# Altium PCB OK1050-C_V1.2.PcbDoc (part 3 of 3)
Units mm, origin at the board's own origin, x right, y up, seen from the top; angles counter-clockwise.
Board outline 103.88 x 80.73 mm, 2 copper layers (Component Side, Bottom Layer), stack 0.325 mm thick; 231 components, 276 nets, 1026 pads, 717 vias.
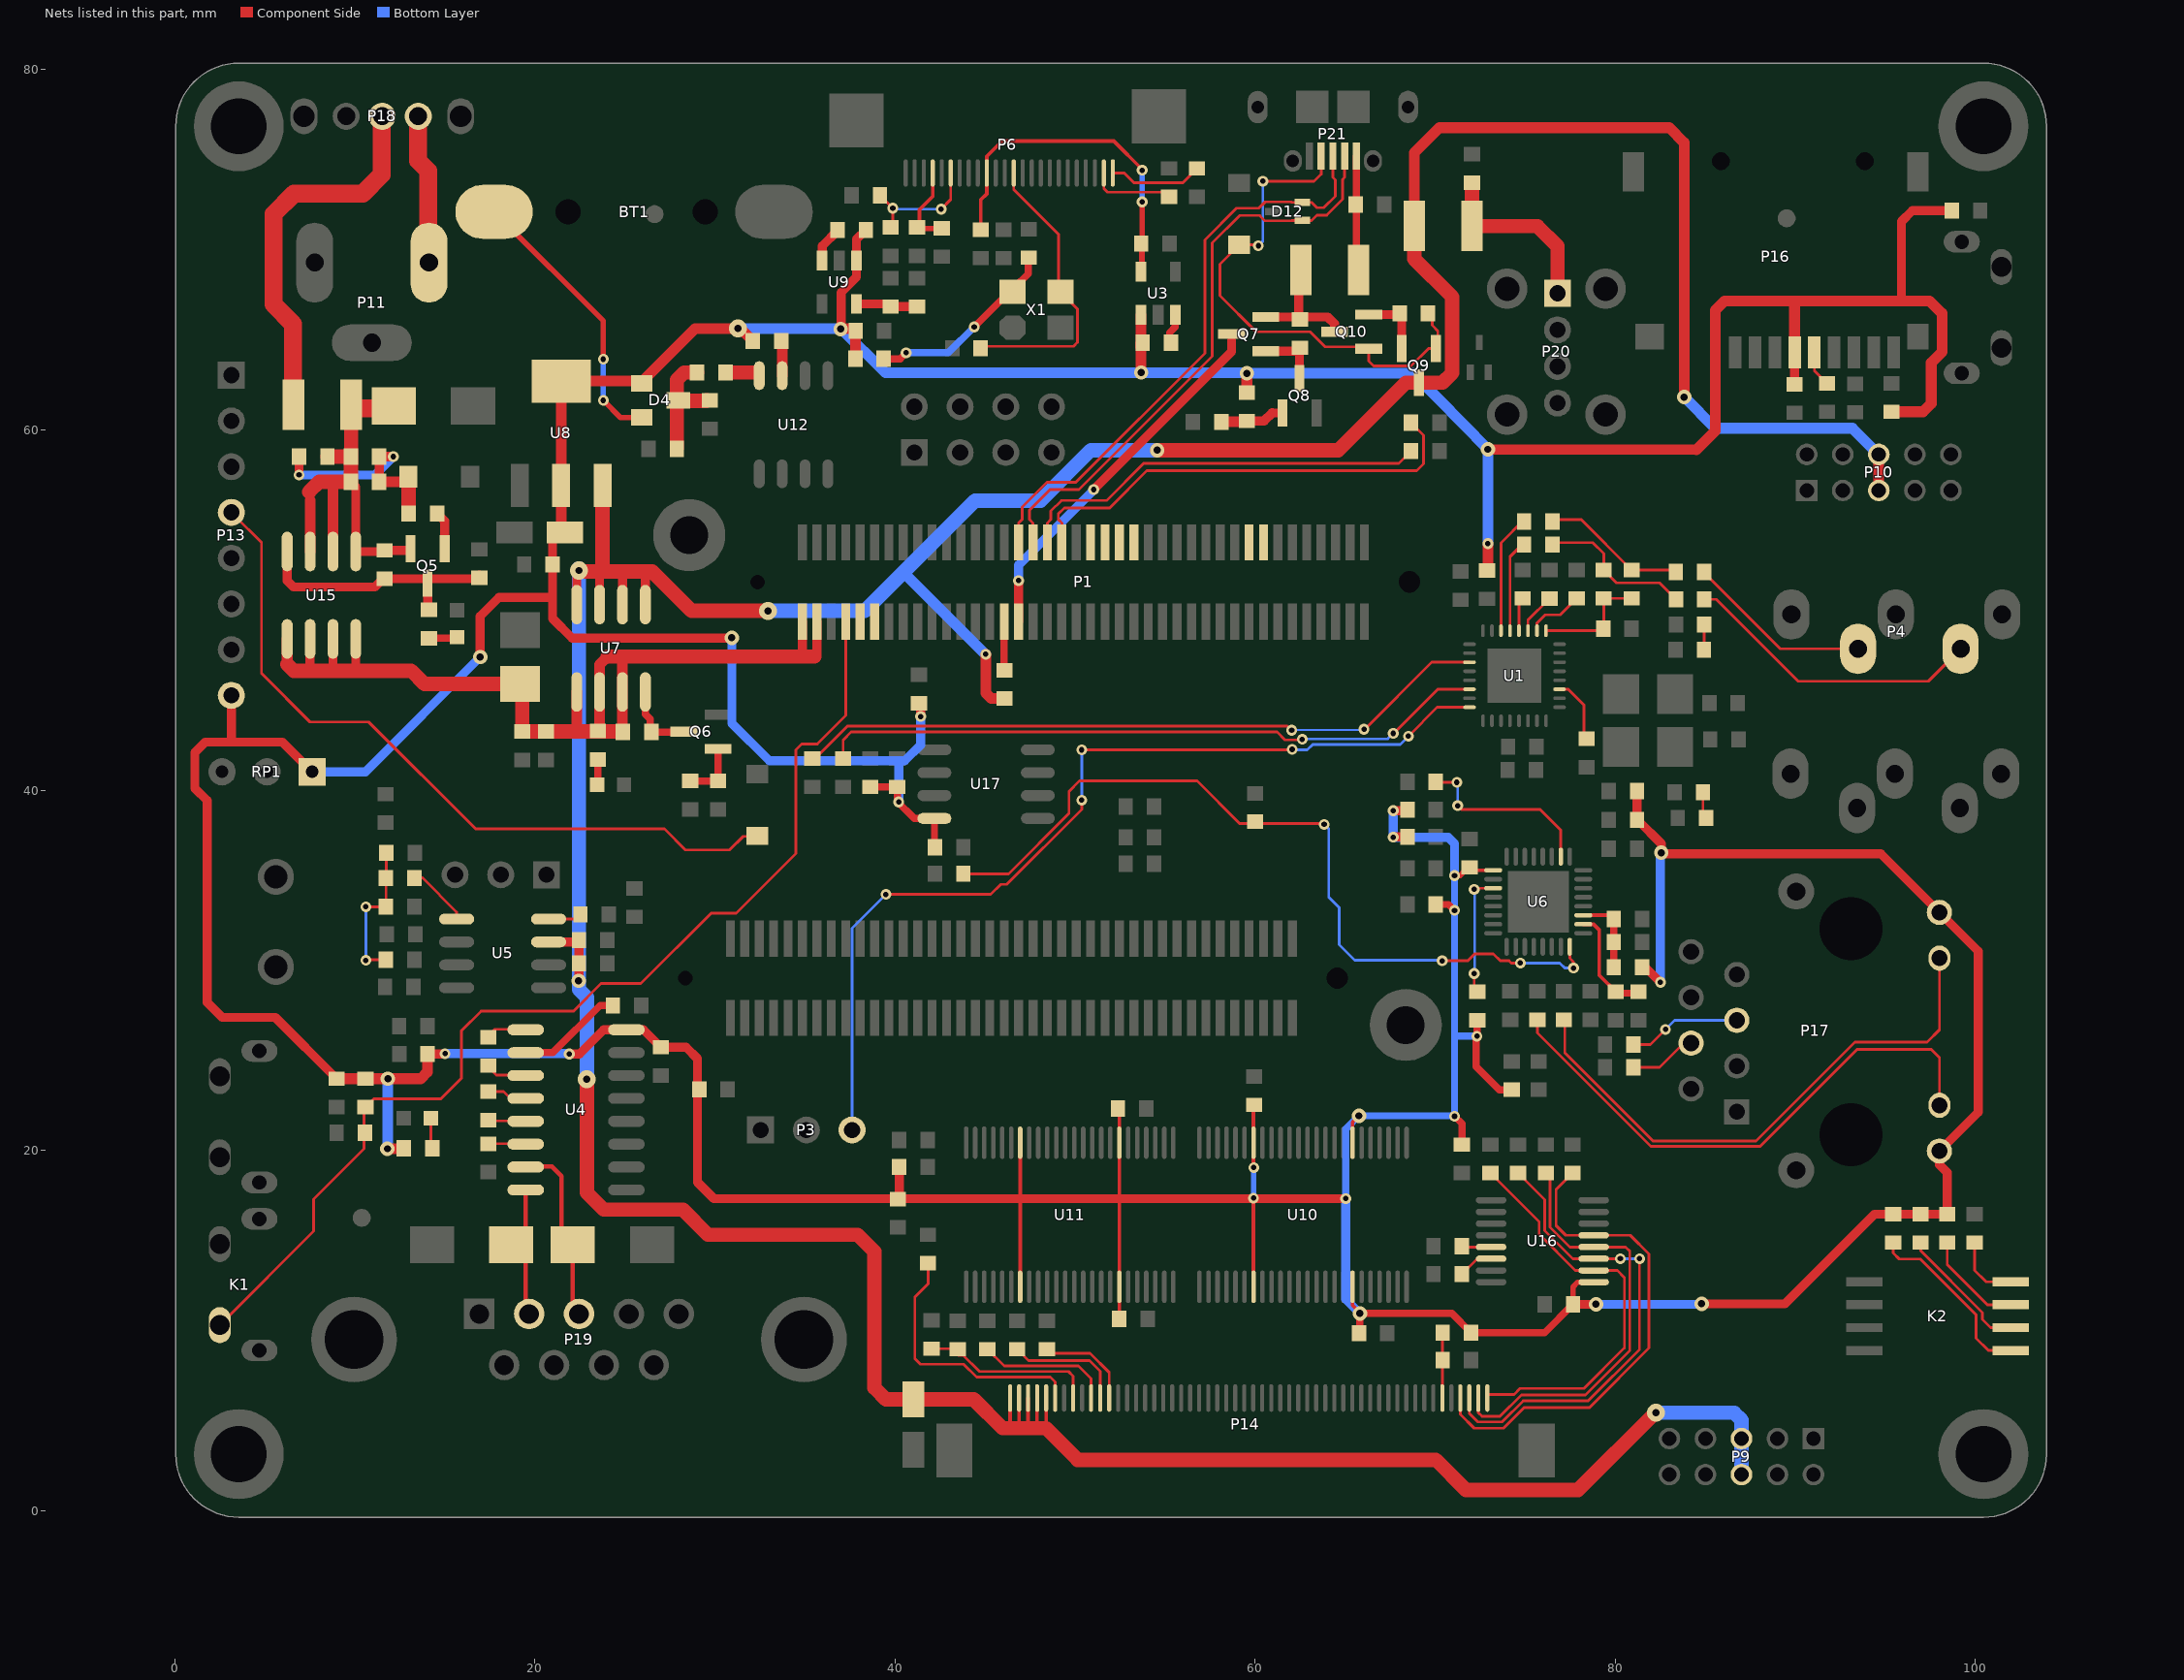
[diagram p3: the nets of this part, all layers, seen from the top]

## Via types
v1: diameter 0.6, hole 0.3, Component Side to Bottom Layer, tented both sides, 667 vias
v2: diameter 0.8, hole 0.4, Component Side to Bottom Layer, tented both sides, 20 vias
v3: diameter 0.66, hole 0.3, Component Side to Bottom Layer, tented both sides, 16 vias
v4: diameter 0.5, hole 0.3, Component Side to Bottom Layer, tented both sides, 9 vias
v5: diameter 1, hole 0.4, Component Side to Bottom Layer, tented both sides, 5 vias

## Nets (pads, with @x,y where several pads share a name; then routed paths per layer and width w, separated by ;. In a path a pad name is that pad's centre, name@x,y a point inside that pad or via, vN(x,y) a via of type N, cw(c..) or ccw(c..) an arc to the next point about the centre after c; other vN are vias at no path point) (continued)
MCLK: P6.13 R62.1 X1.3 | length 16.5
  Component Side w0.152: R62.1@44.602,64.491 44.755,64.643 49.911,64.643 50.133,64.865 50.133,66.721 X1.3@49.179,67.675 ; P6.13@46.593,74.269 46.593,73.345 49.077,70.862 X1.3@49.077,67.65
MICBIAS: C5.2 R3.2 R5.2 U1.1 | length 6.8
  Component Side w0.152: U1.1@76.147,48.626 U1.1@76.147,48.855 C5.2@79.477,48.855 ; C5.2@79.35,48.997 R3.2@79.35,50.648 R5.2@80.899,50.648
MICL: C8.2 FB5.2 R3.1 | length 8.7
  Component Side w0.152: C8.2@76.505,53.746 78.74,53.746 79.35,53.137 R3.1@79.35,52.222 80.061,51.511 82.448,51.511 FB5.2@83.363,50.597
MICR: C10.2 FB4.2 R5.1 | length 7.9
  Component Side w0.152: C10.2@76.505,55.016 78.105,55.016 R5.1@80.899,52.222 FB4.2@83.25,52.222
N3_FLEXSPI__B_SS0: P1.17
N4_FLEXSPI_D1_A: P1.35
N6_OTG1_VBUS: P1.50 Q7.3 | length 20.5
  Component Side w0.5: P1.50@46.861,49.361 46.863,49.363 v1(46.863,51.638) ; v1(51.029,56.693) 58.689,64.353 58.689,64.973
  Bottom Layer w0.5: v1(46.863,51.638) 46.863,52.498 46.861,52.5 51.029,56.667 v1(51.029,56.693)
N13_CLK1_OUT_P: P1.72
NetBT1_1: BT1.1 D4.2 | length 15.3
  Component Side w0.3: BT1.1@18.038,72.111 18.038,71.81 23.8,66.049 v1(23.8,63.932) ; v1(23.8,61.646) 24.765,60.681 D4.2@25.857,60.681
  Bottom Layer w0.3: v1(23.8,61.646) v1(23.8,63.932)
NetC4_2: C4.2 U1.27 | length 3.7
  Component Side w0.152: U1.27@76.897,45.605 77.382,45.605 78.257,44.729 78.257,43.002 C4.2@78.41,42.85
NetC8_1: C8.1 U1.5 | length 5.4
  Component Side w0.152: U1.5@74.147,48.626 U1.5@74.147,48.855 74.147,52.963 C8.1@74.93,53.746
NetC10_1: C10.1 U1.6 | length 6.9
  Component Side w0.152: U1.6@73.647,48.641 U1.6@73.647,48.855 73.647,53.733 C10.1@74.93,55.016
NetC11_2: C11.2 R71.2 U9.5 | length 3.6
  Component Side w0.5: U9.5@37.856,66.999 39.605,66.999 C11.2@39.751,66.853 R71.2@41.224,66.853 R71.2@41.078,66.999
NetC16_1: C16.1 R12.2 | length 1.3
  Component Side w0.152: C16.1@84.861,38.532 R12.2@84.861,39.878
NetC17_1: C17.1 R14.2 | length 1.4
  Component Side w0.152: R14.2@84.938,47.828 C17.1@84.938,49.2
NetC18_1: C18.1 FB6.1 P6.4 | length 4.9
  Component Side w0.2: FB6.1@41.046,71.196 41.351,71.501 41.351,72.238 42.093,72.98 P6.4@42.093,74.269
  Component Side w0.3: FB6.1@41.351,71.196 C18.1@42.723,71.196
NetC19_1: C19.1 P6.6 R18.1 | length 7.2
  Component Side w0.152: C19.1@39.167,73.025 v1(39.878,72.314) R18.1@39.878,71.196 ; v1(42.56,72.263) 43.093,72.796 P6.6@43.093,74.269
  Bottom Layer w0.152: v1@39.878,72.263 v1(42.56,72.263) 42.56,72.07 v1@42.57,72.06
NetC23_1: C23.1 U4.1 | length 2.3
  Component Side w0.152: C23.1@17.342,26.284 17.779,26.722 U4.1@19.495,26.722
NetC23_2: C23.2 U4.3 | length 2.4
  Component Side w0.152: C23.2@17.342,24.709 17.869,24.182 U4.3@19.495,24.182
NetC25_2: C25.2 U4.2 | length 5.9
  Component Side w0.4: U4.2@19.495,25.426 21.007,25.426 23.622,28.042 C25.2@24.333,28.042
NetC26_2: C26.2 U4.6 | length 2.1
  Component Side w0.152: C26.2@17.373,20.372 U4.6@19.495,20.372
NetC27_1: C27.1 U4.5 | length 2.1
  Component Side w0.152: C27.1@17.412,21.642 U4.5@19.495,21.642
NetC27_2: C27.2 U4.4 | length 2.2
  Component Side w0.152: C27.2@17.418,23.261 18.268,23.261 18.643,22.886 U4.4@19.495,22.886
NetC34_1: C34.1 R49.2 R50.2 R51.2 | length 8.3
  Component Side w0.152: v1(10.617,30.556) 10.643,30.582 R51.2@11.76,30.582 ; v1@10.617,33.477 10.668,33.528 R50.2@11.735,33.528 R49.2@11.735,35.128 11.76,35.154 C34.1@11.76,36.525
  Bottom Layer w0.152: v1(10.617,30.556) v1(10.617,33.528)
NetC41_1: C41.1 C42.1 FB8.1 U6.3 | length 4.6
  Component Side w0.2: U6.3@78.217,33.057 C42.1@80.162,33.057
  Component Side w0.381: FB8.1@79.908,30.175 C42.1@79.908,32.817
NetC43_1: C43.1 C44.1 U6.2 | length 6.1
  Component Side w0.2: U6.2@78.217,32.557 78.796,32.557 79.096,32.258 79.096,29.743 C44.1@80.112,28.727
  Component Side w0.381: C44.1@80.112,28.727 C43.1@81.255,28.727
NetC45_2: C45.2 R2.1 U6.32 | length 46
  Component Side w0.152: R2.1@43.79,35.357 46.304,35.357 49.657,38.71 49.657,39.929 50.241,40.513 56.769,40.513 59.131,38.151 v1@63.83,38.151 ; v1(70.383,30.531) 71.806,30.531 72.187,30.912 73.228,30.912 73.609,30.531 74.092,30.531 74.219,30.404 v1(74.727,30.404) ; U6.32@77.467,31.307 77.467,30.66 77.673,30.455 v1(77.673,30.124)
  Bottom Layer w0.152: v1(63.83,38.1) 64.084,37.846 64.084,34.061 64.668,33.477 64.668,31.42 65.532,30.556 v1@70.409,30.556 ; v1(74.727,30.404) 76.911,30.404 77.191,30.124 v1(77.673,30.124)
NetC47_2: C47.2 P17.4 | length 4
  Component Side w0.152: C47.2@80.95,24.613 82.455,24.613 P17.4@84.203,26.361
NetC48_2: C48.2 P17.5 | length 6.3
  Component Side w0.152: C48.2@80.95,25.883 81.94,25.883 v1(82.779,26.721)
  Bottom Layer w0.152: v1(82.779,26.721) 83.282,27.224 P17.5@86.743,27.224
NetC54_1: C54.1 D9.2 F1.2 Q5.2 R81.2 R82.2 R83.2 U15.1 U15.2 U15.3 | length 23.8
  Component Side w0.5: R82.2@9.779,57.125 10.058,56.845 U15.1@10.058,53.25 C54.1@11.633,53.25 ; C54.1@11.735,53.315 Q5.2@13.01,53.315
  Component Side w0.6: U15.3@7.518,53.25 7.518,56.109 ; U15.2@8.788,53.25 8.788,57.048
  Component Side w0.8: 7.468,56.566 8.026,57.125 R82.2@9.779,57.125 R83.2@9.779,58.522 R81.2@8.484,58.522 ; R83.2@9.798,58.694 F1.2@9.798,61.209
  Component Side w1: F1.2@9.798,61.209 12.322,61.209 D9.2@12.348,61.184
NetC54_2: C54.2 Q5.3 R89.2 R91.1 U15.4 | length 14.2
  Component Side w0.5: U15.4@6.248,53.25 6.248,51.638 6.604,51.283 11.125,51.283 C54.2@11.608,51.765 ; C54.2@11.659,51.74 16.713,51.74 R89.2@16.916,51.943 ; R91.1@14.021,50.013 14.046,50.038 Q5.3@14.046,51.501
NetC60_2: C60.2 F2.2 P20.1 | length 10.2
  Component Side w0.8: C60.2@72.034,73.736 F2.2@72.034,71.323 75.667,71.323 76.784,70.206 P20.1@76.784,67.589
NetC61_2: C61.2 F3.1 P21.1 | length 6.2
  Component Side w0.4: F3.1@65.613,68.986 P21.1@65.613,75.201
NetC62_1: C62.1 P14.47 R54.2 | length 9.5
  Component Side w0.152: C62.1@42.031,8.987 R54.2@43.428,8.987 ; R54.2@43.504,8.631 43.783,8.631 44.693,7.722 49.632,7.722 49.89,7.463 P14.47@49.89,6.25
NetC68_2: C68.2 R68.1 X1.4 | length 10.5
  Component Side w0.4: R68.1@39.37,63.957 40.284,63.957 v1(40.615,64.287) v1@40.64,64.313 ; v1(44.399,65.724) X1.4@46.351,67.675 ; X1.4@46.376,67.954 46.681,67.954 47.396,68.67 C68.2@47.396,69.291
  Bottom Layer w0.4: v1(40.615,64.287) 42.963,64.287 v1(44.399,65.724)
NetD3_2: D3.2 P13.4 | length 41.6
  Component Side w0.152: P13.4@3.073,55.27 3.302,55.27 4.826,53.746 4.826,46.48 7.517,43.79 10.77,43.79 16.714,37.845 27.204,37.845 28.366,36.683 30.816,36.683 31.572,37.44 D3.2@32.36,37.44
NetD5_2: D5.2 P21.4 Q9.1 Q10.1 R97.1 | length 29
  Component Side w0.152: v1(60.173,70.231) 60.122,70.282 D5.2@59.106,70.282 58.039,69.215 58.039,67.462 60.046,65.456 63.043,65.456 63.881,64.618 Q10.1@66.304,64.618 ; v1(60.427,73.812) 63.271,73.812 63.663,74.204 P21.4@63.663,75.201 ; Q10.1@66.304,64.506 66.304,63.82 66.576,63.548 68.654,63.548 69.632,64.526 Q9.1@70.038,64.526 70.14,64.526 70.14,65.496 69.825,65.811 R97.1@69.825,66.472
  Bottom Layer w0.152: v1(60.173,70.231) 60.427,70.485 v1(60.427,73.812)
NetD10_2: D10.2 R81.1 R82.1 R83.1 R85.2 | length 12.3
  Component Side w0.2: D10.2@12.902,57.125 D10.2@12.998,57.221
  Component Side w0.5: v1(6.909,57.506) R81.1@6.909,58.522
  Component Side w0.52: R82.1@11.354,57.125 R83.1@11.354,58.522 v1(12.141,58.522)
  Component Side w0.6: R82.1@11.354,57.125 D10.2@12.902,57.125
  Component Side w0.8: R85.2@12.998,55.443 D10.2@12.998,57.221
  Bottom Layer w0.5: v1(6.909,57.506) 11.125,57.506 v1(12.141,58.522)
NetF1_1: F1.1 P18.2 | length 21
  Component Side w1: F1.1@6.579,61.595 6.579,65.888 5.486,66.98 5.486,71.984 6.629,73.127 10.439,73.127 11.494,74.181 P18.2@11.494,77.419
NetF3_2: F3.2 Q7.2 Q10.3 R92.2 | length 6.9
  Component Side w0.5: Q7.2@60.589,66.279 R92.2@62.418,66.279 ; F3.2@62.418,68.768 R92.2@62.418,66.279 ; Q10.3@64.404,65.456 64.404,65.898 64.023,66.279 R92.2@62.418,66.279
NetFB4_1: FB4.1 P4.2 | length 10.7
  Component Side w0.152: FB4.1@84.892,52.116 89.159,47.849 P4.2@93.473,47.849 P4.2@93.473,48.23
NetFB5_1: FB5.1 P4.5 | length 17.2
  Component Side w0.152: FB5.1@84.938,50.597 85.598,50.597 90.145,46.05 97.375,46.05 P4.5@99.173,47.849 P4.5@99.173,48.23
NetK2_5: K2.5 R31.2 | length 10.1
  Component Side w0.152: R31.2@95.428,14.884 95.428,14.3 95.758,13.97 96.926,13.97 100.025,10.871 100.025,9.576 100.711,8.89 K2.5@101.956,8.89
NetK2_6: K2.6 R30.2 | length 7.5
  Component Side w0.152: R30.2@96.952,14.884 96.952,14.427 100.381,10.998 100.381,10.617 100.838,10.16 K2.6@101.956,10.16
NetK2_7: K2.7 R28.2 | length 5.7
  Component Side w0.152: R28.2@98.425,14.884 98.425,13.665 100.66,11.43 K2.7@101.956,11.43
NetK2_8: K2.8 R27.2 | length 3.8
  Component Side w0.152: R27.2@99.949,14.884 99.949,13.335 100.584,12.7 K2.8@101.956,12.7
NetLED2_1: LED2.1 R26.2 | length 1.8
  Component Side w0.152: LED2.1@14.224,21.793 14.224,20.193 R26.2@14.3,20.117 R26.2@14.3,20.217
NetLED3_1: LED3.1 R87.2 | length 1.4
  Component Side w0.4: LED3.1@23.495,40.31 R87.2@23.495,41.707
NetLED4_1: LED4.1 R91.2 | length 1.5
  Component Side w0.4: R91.2@14.122,48.438 LED4.1@15.608,48.438
NetP6_23: P6.23 R20.1 | length 4.7
  Component Side w0.152: P6.23@51.593,74.269 51.593,73.4 51.791,73.203 54.966,73.203 R20.1@55.22,72.949
NetP6_24: P6.24 R47.1 | length 5.2
  Component Side w0.152: P6.24@52.093,74.269 52.731,74.269 53.264,73.736 55.982,73.736 R47.1@56.769,74.524
NetP11_1: P11.1 P18.1 | length 8.6
  Component Side w1: P18.1@13.526,77.419 13.526,74.943 14.072,74.397 14.072,69.825 P11.1@14.605,69.291
NetP14_6: P14.6 R45.2 R46.2 | length 3.6
  Component Side w0.152: P14.6@70.39,6.445 R45.2@70.39,10.084
NetP14_43: P14.43 R103.2 | length 5.4
  Component Side w0.152: R103.2@48.431,8.961 48.655,8.738 50.825,8.738 51.89,7.673 P14.43@51.89,6.25
NetP14_44: P14.44 R104.2 | length 6.6
  Component Side w0.152: R104.2@46.78,8.961 47.411,8.33 50.801,8.33 51.39,7.741 P14.44@51.39,6.25
NetP14_45: P14.45 R105.2 | length 7.5
  Component Side w0.152: R105.2@45.129,8.961 46.064,8.026 50.19,8.026 50.89,7.327 P14.45@50.89,6.25
NetP14_49: P14.49 R53.2 | length 14.8
  Component Side w0.152: R53.2@41.834,13.741 41.834,12.598 41.097,11.862 41.097,8.433 41.402,8.128 43.815,8.128 44.531,7.412 48.621,7.412 48.89,7.142 P14.49@48.89,6.25
NetP16_5: P16.5 R57.2 | length 2
  Component Side w0.152: P16.5@91.05,64.309 91.05,63.281 R57.2@91.745,62.586
NetP17_10: P17.10 R77.2 | length 30.3
  Component Side w0.152: R77.2@75.667,27.254 75.667,26.518 81.966,20.218 88.036,20.218 93.421,25.603 97.536,25.603 97.993,25.146 P17.10@97.993,22.911
NetP17_11: P17.11 R78.2 | length 31.1
  Component Side w0.152: R78.2@77.191,27.178 77.191,25.424 82.091,20.523 87.808,20.523 93.294,26.01 97.307,26.01 97.993,26.695 P17.11@97.993,30.674
NetQ5_1: Q5.1 R85.1 | length 2.1
  Component Side w0.5: R85.1@14.573,55.367 14.996,54.944 Q5.1@14.996,53.401
NetQ6_1: Q6.1 R88.1 R90.2 | length 3.3
  Component Side w0.4: R90.2@28.626,40.513 R88.1@30.175,40.513 Q6.1@30.175,42.296
NetQ6_3: Q6.3 R84.1 U7.4 | length 4.1
  Component Side w0.4: U7.4@26.137,45.429 26.137,44.221 26.416,43.942 R84.1@26.416,43.231 ; R84.1@26.441,43.231 Q6.3@28.26,43.231
NetQ7_1: Q7.1 Q8.3 R92.1 | length 3.8
  Component Side w0.5: Q7.1@60.589,64.379 62.169,64.379 62.459,64.668 Q8.3@62.459,62.85
NetQ8_1: Q8.1 R95.1 R96.2 | length 3.5
  Component Side w0.5: R95.1@59.538,60.503 60.503,60.503 ; 60.95,60.95 Q8.1@61.509,60.95
  Component Side w0.52: 60.503,60.503 60.95,60.95
  Component Side w0.6: R96.2@58.115,60.452 R95.1@59.411,60.452
NetQ9_2: Q9.2 Q10.2 R97.2 | length 3.5
  Component Side w0.5: Q10.2@66.304,66.406 R97.2@68.021,66.396 ; Q9.2@68.138,64.526 R97.2@68.138,66.355
NetR1_1: R1.1 U9.3 | length 2.1
  Component Side w0.5: U9.3@35.956,69.399 35.956,70.211 R1.1@36.805,71.059
  Component Side w0.6: R1.1@36.805,71.059 R1.1@36.805,71.11
NetR4_1: R4.1 U1.2 | length 3.4
  Component Side w0.152: U1.2@75.647,48.626 U1.2@75.647,48.855 75.647,49.281 76.098,49.733 76.937,49.733 R4.1@77.851,50.648
NetR7_1: R7.1 U1.3 | length 2.5
  Component Side w0.152: U1.3@75.147,48.626 U1.3@75.147,48.855 75.147,49.449 R7.1@76.34,50.643
NetR8_1: R8.1 U1.4 | length 2.1
  Component Side w0.152: U1.4@74.647,48.626 U1.4@74.647,48.855 74.647,50.44 R8.1@74.854,50.648
NetR19_1: R19.1 U3.3 | length 1.7
  Component Side w0.4: R19.1@55.245,64.846 55.245,65.405 55.56,65.72 U3.3@55.56,66.389
NetR35_1: R35.1 U1.14 | length 37.3
  Component Side w0.152: R35.1@37.114,41.758 37.114,42.778 37.567,43.231 61.214,43.231 61.651,42.794 v1@62.636,42.794 ; v1@67.666,43.129 70.141,45.605 U1.14@71.897,45.605
  Bottom Layer w0.152: v1@62.636,42.85 67.361,42.85 v1(67.666,43.155)
  other v1: 62.611,42.824
NetR36_1: R36.1 U1.11 | length 38.8
  Component Side w0.152: R36.1@35.611,41.758 35.585,41.783 37.363,43.561 61.773,43.561 v1@61.976,43.358 ; v1@66.04,43.332 69.813,47.105 U1.11@71.897,47.105
  Bottom Layer w0.152: v1@62.001,43.358 62.027,43.358 66.04,43.332 v1@65.964,43.256
  other v1: 62.027,43.332 66.04,43.383
NetR37_2: R37.2 U16.14 | length 2.2
  Component Side w0.152: R37.2@71.476,13.132 72.329,13.986 U16.14@73.325,13.986
NetR38_2: R38.2 U16.13 | length 1.6
  Component Side w0.152: R38.2@71.521,14.636 U16.13@73.096,14.636
NetR48_2: R48.2 U5.4 | length 2.1
  Component Side w0.152: U5.4@20.762,32.842 22.377,32.842 22.53,32.995 R48.2@22.784,32.995
NetR49_1: R49.1 U5.5 | length 3.5
  Component Side w0.152: R49.1@13.31,35.128 13.767,35.128 15.662,33.233 U5.5@15.662,32.842
NetR64_1: R64.1 U6.10 | length 10.2
  Component Side w0.152: R64.1@70.053,40.437 v1(71.196,40.437) ; v1@71.196,39.141 v1(71.247,39.141) 71.45,38.938 75.819,38.938 76.967,37.79 U6.10@76.967,36.307
  Bottom Layer w0.152: v1(71.247,39.141) v1@71.247,40.386
NetR75_2: R75.2 U6.19 | length 6.3
  Component Side w0.152: R75.2@72.161,28.905 v1(72.161,29.82) ; v1@72.161,34.557 U6.19@72.913,34.557
  Bottom Layer w0.152: v1@72.187,29.769 v1@72.187,34.417
  other v1: 72.161,34.493
NetR120_2: R120.2 U12.8 | length 1.8
  Component Side w0.8: R120.2@30.582,63.195 U12.8@32.334,63.195
NetR121_2: R121.2 U12.7 | length 2
  Component Side w0.6: R121.2@33.655,64.948 33.731,64.872 U12.7@33.731,63.017
P2_FLEXSPI_CLK_B: P1.15
P3_FLEXSPI_D0_A: P1.33
P4_FLEXSPI_D2_A: P1.37
P5_FLEXSPI_D3_A: P1.39
P6_OTG2_VBUS: P1.52 R10.1 | length 2.7
  Component Side w0.4: R10.1@46.061,46.66 P1.52@46.061,49.361
P13_CLK1_OUT_N: P1.70
POR_BUTTON: C28.2 K1.2 P1.74 R23.1 | length 61.3
  Component Side w0.152: K1.2@2.681,10.123 2.681,10.472 7.722,15.512 7.722,17.297 10.516,20.091 R23.1@10.516,22.403 ; R23.1@10.592,22.403 11.049,22.86 14.783,22.86 15.926,24.003 15.926,26.645 17.018,27.737 22.151,27.737 23.675,29.262 25.883,29.262 29.795,33.173 31.192,33.173 34.493,36.474 34.493,42.24 34.823,42.57 35.687,42.57 37.261,44.145 P1.74@37.261,49.361
RS232_RXD: D1.1 P19.2 U4.8 | length 7.3
  Component Side w0.254: D1.1@19.421,14.757 D1.1@19.495,14.684 ; U4.8@19.495,17.806 D1.1@19.495,14.684 ; P19.2@19.684,10.92 19.495,11.109 D1.1@19.495,14.684 ; D1.1@19.684,14.495 D1.1@19.495,14.684
RS232_TXD: D2.1 P19.3 U4.7 | length 9.9
  Component Side w0.254: U4.7@19.495,19.102 20.954,19.102 21.488,18.567 D2.1@21.488,14.834 ; D2.1@22.108,14.757 22.108,11.266 P19.3@22.454,10.92
SAL1_RXD: P3.3 U1.16 | length 52.4
  Component Side w0.152: v1(39.497,34.214) 45.312,34.214 45.871,34.773 46.203,34.773 50.368,38.938 v1(50.368,39.446) ; v1(50.368,42.24) v1@62.052,42.24 ; v1(68.504,43.002) 70.107,44.605 U1.16@71.897,44.605
  Bottom Layer w0.152: P3.3@37.617,21.133 37.617,32.334 v1(39.497,34.214) ; v1(50.368,39.446) v1@50.368,42.164 ; v1@62.052,42.24 62.89,42.24 63.195,42.545 68.047,42.545 v1(68.504,43.002)
  other v1: 62.052,42.266
TX+: P14.1 R106.2 U16.2 | length 22.8
  Component Side w0.152: P14.1@72.89,6.445 74.37,6.445 74.707,6.782 78.257,6.782 80.498,9.022 80.498,12.949 80.111,13.336 U16.2@78.796,13.336 77.774,13.336 75.769,15.341 75.769,16.033 R106.2@73.057,18.745
TX-: P14.2 R107.2 U16.4 | length 24.6
  Component Side w0.152: P14.2@72.39,6.445 72.39,5.436 72.593,5.232 73.588,5.232 74.781,6.426 78.332,6.426 80.802,8.896 80.802,14.397 80.564,14.636 U16.4@78.796,14.636 77.467,14.636 76.378,15.724 76.378,18.517 R107.2@76.149,18.745
TY+: P14.3 R108.2 U16.3 | length 27
  Component Side w0.152: P14.3@71.89,6.445 P14.3@71.89,6.25 71.89,5.402 72.365,4.928 73.713,4.928 74.881,6.096 78.486,6.096 81.341,8.951 v1(81.341,13.986) ; R108.2@74.6,18.745 76.073,17.272 76.073,15.545 77.632,13.986 U16.3@78.796,13.986 v1(80.274,13.986)
  Bottom Layer w0.152: v1(80.274,13.986) v1@81.239,13.986
TY-: P14.4 R109.2 U16.5 | length 28.1
  Component Side w0.152: P14.4@71.39,6.445 P14.4@71.39,6.25 71.39,5.343 72.161,4.572 73.787,4.572 74.93,5.715 78.562,5.715 81.869,9.021 81.869,14.245 80.828,15.286 U16.5@78.796,15.286 77.247,15.286 76.708,15.824 76.708,17.831 R109.2@77.622,18.745
USB2_N: P1.43 R93.2 | length 25.7
  Component Side w0.152: P1.43@49.261,53.761 49.261,54.837 49.064,55.034 49.064,55.338 49.403,55.677 51.918,55.677 53.975,57.734 68.961,57.734 69.342,58.115 69.342,59.715 R93.2@68.656,60.401
USB2_P: P1.45 R94.2 | length 23.2
  Component Side w0.152: P1.45@48.461,53.761 48.461,54.837 48.658,55.034 48.658,55.506 49.235,56.083 51.749,56.083 53.807,58.14 67.97,58.14 R94.2@68.656,58.826
USB_OTG_N: D12.1 P1.47 P21.2 | length 32.8
  Component Side w0.152: P1.47@47.661,53.761 47.661,54.837 47.464,55.034 47.464,55.55 48.607,56.693 50.206,56.693 57.607,64.094 57.607,70.383 59.131,71.907 60.254,71.907 60.55,71.612 61.994,71.612 62.019,71.636 D12.1@62.623,71.636 63.124,71.636 63.421,71.933 63.973,71.933 64.846,72.806 64.846,73.903 64.962,74.02 P21.2@64.962,75.201
USB_OTG_P: D12.2 P1.49 P21.3 | length 32.8
  Component Side w0.152: P1.49@46.861,53.761 46.861,54.837 47.058,55.034 47.058,55.718 48.439,57.099 50.038,57.099 57.201,64.262 57.201,70.552 58.963,72.313 60.203,72.313 60.558,72.668 61.994,72.668 62.026,72.636 D12.2@62.623,72.636 63.124,72.636 63.421,72.339 63.805,72.339 64.44,72.974 64.44,73.893 64.313,74.02 P21.3@64.313,75.201
V_CORE5V: C56.1 C57.1 C59.1 P1.78 P1.80 R84.2 R87.1 U7.1 U7.2 U7.3 U15.5 U15.6 U15.7 U15.8 | length 54.3
  Component Side w0.5: 7.493,46.634 7.518,46.66 U15.6@7.518,48.4 ; U15.7@8.788,48.4 8.788,46.66 8.814,46.634 ; 10.058,46.66 U15.8@10.058,48.4 ; 34.861,47.485 P1.80@34.861,49.361 ; 35.509,47.422 35.661,47.574 P1.78@35.661,49.361
  Component Side w0.6: 6.248,46.99 U15.5@6.248,48.4 ; 22.327,43.256 U7.1@22.327,45.454 ; R87.1@23.597,43.383 U7.2@23.597,45.454 23.597,46.965 24.054,47.422 ; R84.2@24.867,43.256 U7.3@24.867,45.454 24.867,47.396
  Component Side w0.8: 6.248,46.99 6.604,46.634 7.493,46.634 8.814,46.634 13.132,46.634 13.87,45.896 C59.1@19.177,45.896 19.304,45.896 C56.1@19.304,43.256 C57.1@20.625,43.256 22.327,43.256 R84.2@24.867,43.256 ; 24.054,47.422 35.509,47.422
VCC1V8: C20.1 C22.2 P6.10 U3.5 | length 19.5
  Component Side w0.2: C20.1@44.755,71.222 44.755,72.771 45.093,73.11 P6.10@45.093,74.269 45.093,75.192 45.949,76.048 52.146,76.048 v1@53.746,74.447
  Component Side w0.3: U3.5@53.711,68.789 C22.2@53.711,70.145 ; C22.2@53.721,70.155 v1(53.721,72.669) v1@53.721,72.695 ; v1(53.721,74.422) v1@53.746,74.447
  Bottom Layer w0.3: v1(53.721,72.669) v1(53.721,74.422)
VCC3V3: C3.2 C24.2 C36.2 C38.1 C40.1 C49.1 C52.2 C64.2 C65.2 C66.2 C67.2 D4.1 FB1.2 FB8.2 P13.8 P16.4 P17.9 P17.12 R1.2 R6.1 R9.2 R11.1 R16.1 R19.2 R22.2 R23.2 R25.1 R26.1 R28.1 R29.2 R30.1 R31.1 R39.2 R41.2 R45.1 R59.1 R63.1 R65.2 R67.2 R68.2 R70.2 R75.1 R80.2 R95.2 R100.2 R101.2 R102.2 R121.1 RP1.1 U3.1 U4.16 U6.17 U8.2 U8.4 U9.1 U10.7 U10.18 U10.31 U10.42 U11.7 U11.18 U11.31 U11.42 U16.1 U17.8 | length 473.6
  Component Side w0.2: U11.31@46.951,12.429 46.951,17.247 ; 46.951,17.323 U11.18@46.951,20.429 ; C65.2@52.451,10.643 U11.42@52.451,12.429 52.451,17.323 U11.7@52.451,20.429 C67.2@52.451,22.072 ; U10.31@59.905,12.429 v1@59.905,17.285 ; v1@59.905,19.063 U10.18@59.905,20.429 C66.2@59.905,22.289 ; U10.42@65.405,12.429 65.405,11.404 65.811,10.998 v2(65.811,10.947) ; U10.7@65.405,20.429 65.405,21.565 v2(65.761,21.92) ; C40.1@71.831,35.712 71.986,35.557 U6.17@73.217,35.557
  Component Side w0.3: v1(71.069,35.255) 71.373,35.255 C40.1@71.553,35.435 ; C40.1@71.554,35.435 C40.1@71.831,35.712 ; C38.1@77.648,11.455 77.648,12.421 77.913,12.686 U16.1@78.796,12.686 U16.1@78.948,12.686
  Component Side w0.4: R102.2@38.617,40.183 R101.2@40.121,40.183 40.121,39.381 41.072,38.43 U17.8@41.91,38.43 ; R59.1@42.189,36.881 U17.8@42.189,38.432 ; C64.2@65.811,9.855 v2(65.811,10.947) 70.917,10.947 R45.1@71.984,9.881 76.073,9.881 C38.1@77.648,11.455 ; R80.2@70.028,33.655 70.739,33.655 v1(71.069,33.325) ; v1(71.069,21.895) 71.476,21.488 R41.2@71.476,20.345 ; R75.1@72.339,27.229 72.314,27.203 v1(72.314,26.34) 72.271,26.297 72.271,24.655 73.558,23.368 R63.1@74.244,23.368
  Component Side w0.5: 3.15,42.774 P13.8@3.15,45.263 P13.8@3.389,45.263 ; RP1.1@7.631,41.021 5.98,42.672 1.702,42.672 1.118,42.088 1.118,40.107 1.803,39.421 1.803,28.219 2.642,27.381 5.588,27.381 R9.2@8.992,23.978 ; R25.1@14.046,25.349 v1@14.986,25.349 ; v2(16.967,47.396) 16.967,49.657 18.009,50.698 20.904,50.698 ; C49.1@20.98,54.229 C52.2@20.98,52.527 20.98,49.53 22.073,48.438 v2@30.937,48.438 ; v1(21.914,25.349) 22.479,25.349 23.826,26.696 U4.16@25.083,26.696 26.034,26.696 C24.2@27,25.73 28.397,25.73 29.032,25.095 29.032,18.237 29.947,17.323 46.951,17.323 52.451,17.323 v1(65.024,17.323) ; v2@37.008,65.634 37.008,67.64 37.856,68.489 U9.1@37.856,69.399 37.856,70.586 R1.2@38.379,71.11 ; C3.2@40.234,17.424 R16.1@40.234,19.075 ; R100.2@41.25,44.831 41.427,44.653 v1(41.427,44.094) ; v1(67.666,38.862) R65.2@68.402,38.862 ; v1@67.691,37.414 R67.2@68.453,37.414 ; C38.1@77.648,11.455 v2(78.918,11.455) ; FB1.2@81.229,39.954 81.204,39.929 R6.1@81.204,38.354 81.204,38.278 81.255,38.329 82.561,37.022 82.561,36.489 82.575,36.474 94.733,36.474 P17.12@97.993,33.214 100.152,31.055 100.152,22.123 P17.9@97.993,19.964 97.993,19.202 98.425,18.771 R28.1@98.425,16.459 R30.1@96.952,16.459 R31.1@95.428,16.459 94.386,16.459 89.408,11.481 v2(84.785,11.481) ; FB8.2@81.661,30.175 v1(82.499,29.337) ; C36.2@89.941,62.535 P16.4@89.941,64.3 ; 95.822,67.17 95.885,67.234 95.885,71.577 96.495,72.187 R29.2@98.679,72.187
  Component Side w0.6: R9.2@8.992,23.978 R23.2@10.592,23.978 v2(11.836,23.978) 13.665,23.978 14.046,24.359 R25.1@14.046,25.349 ; v2(11.811,20.091) 12.7,20.091 R26.1@12.725,20.117 ; C49.1@21.695,54.305 21.465,54.535 U8.2@21.465,56.919 U8.4@21.465,62.181 ; U8.4@21.869,62.586 U8.4@21.465,62.181 ; R121.1@32.029,64.999 R121.1@32.08,64.948 ; R121.1@32.106,64.948 31.42,65.634 v5(31.267,65.634) 28.905,65.634 25.857,62.586 25.724,62.719 U8.4@21.465,62.719 U8.4@21.465,62.181 ; v2@37.008,65.634 R70.2@37.821,65.634 ; R68.2@37.795,63.957 R68.2@37.821,63.983 ; R68.2@37.795,63.983 R70.2@37.795,65.507 ; v2@53.645,63.246 53.66,63.261 U3.1@53.66,66.389 ; R19.2@53.645,64.618 R19.2@53.645,64.821 ; R95.2@59.538,62.23 v2(59.538,63.144) ; R11.1@72.923,52.248 v1(72.923,53.696) ; v2(72.923,58.928) 84.505,58.902 85.547,59.944 85.547,66.65 86.068,67.17 89.95,67.17 ; P16.4@89.95,64.309 89.95,67.17 ; R22.2@95.326,61.011 97.079,61.011 97.536,61.468 97.536,63.729 98.146,64.338 98.146,66.472 97.447,67.17 95.822,67.17 89.95,67.17
  Bottom Layer w0.2: v1@59.905,17.272 v1(59.905,17.348)
  Bottom Layer w0.3: v1(59.905,17.348) v1@59.905,19.037
  Bottom Layer w0.4: v1(65.024,17.323) 65.024,21.184 v2(65.761,21.92) v1@70.917,21.92 ; v1@70.968,21.844 v1@70.968,21.895 ; v1(71.069,35.255) v1(71.069,33.325) 71.069,26.34 ; v1(72.314,26.34) 71.069,26.34 ; v1@70.917,21.92 70.917,21.895 70.942,21.92 v1@70.917,21.92 ; v1@70.917,21.92 71.069,22.073 71.069,26.34
  Bottom Layer w0.5: RP1.1@7.631,41.021 10.592,41.021 v2(16.967,47.396) ; v1(15.011,25.375) v1@21.914,25.375 ; v2(30.937,48.463) 30.937,43.713 33.02,41.631 40.208,41.631 ; v1(40.208,39.345) 40.208,41.631 ; v1@41.421,44.064 41.421,42.513 40.538,41.631 40.208,41.631 ; v1(65.024,17.323) 65.024,11.735 v2(65.811,10.947) ; v1(67.666,38.862) v1(67.666,37.389) 70.714,37.389 71.069,37.033 v1(71.069,35.255) ; v2(78.918,11.455) v2@84.785,11.455 ; v1(82.499,29.337) v2@82.499,36.424
  Bottom Layer w0.6: v2@11.836,20.269 v2(11.836,23.978) ; v5(31.267,65.634) 37.008,65.634 39.472,63.17 v2@53.569,63.17 ; v2@53.746,63.17 v2@59.538,63.17 ; v2(59.538,63.144) 68.783,63.144 v2(72.923,58.928) v1(72.923,53.696)
  other v1: 59.919,19.05
  other v2: 82.55,36.525 53.67,63.195 36.982,65.608
VCC5V: C30.1 C31.1 C35.1 F2.1 P9.5 P9.6 P10.5 P10.6 P14.50 P14.51 P14.52 P14.53 P14.54 Q9.3 R10.2 U5.3 U7.5 U7.6 U7.7 U7.8 U8.1 | length 260.4
  Component Side w0.2: 46.39,4.572 P14.54@46.39,6.25 ; 46.89,4.596 P14.53@46.89,6.25 ; 47.39,4.578 P14.52@47.39,6.25 ; 47.89,4.688 P14.51@47.89,6.25 ; 48.39,4.569 P14.50@48.39,6.25
  Component Side w0.5: U5.3@20.762,31.572 C31.1@22.454,31.572 ; U7.8@22.327,50.304 v5@22.327,51.994 ; v2(22.428,29.413) 22.454,29.439 C30.1@22.454,30.378 ; C30.1@22.454,30.429 C31.1@22.454,31.572 ; C31.1@22.454,31.623 C31.1@22.454,31.572 ; U7.7@23.597,50.304 23.597,52.121 ; U7.6@24.867,50.304 24.867,52.121 ; U7.5@26.137,50.279 U7.5@26.137,50.304 26.137,51.714
  Component Side w0.6: v1(45.035,47.55) 45.035,45.389 45.339,45.085 R10.2@46.076,45.085 ; F2.1@68.834,71.323 68.834,75.387 70.231,76.784 82.982,76.784 83.82,75.946 v2(83.82,61.824) ; P10.5@94.627,56.642 P10.6@94.627,58.642
  Component Side w0.8: v5@22.479,52.146 23.876,52.146 ; v5(22.885,23.952) 22.885,17.653 23.825,16.713 28.219,16.713 29.616,15.316 37.922,15.316 38.862,14.376 38.862,6.807 39.494,6.175 40.795,6.175 C35.1@41.021,6.401 ; U8.1@23.765,56.919 23.765,52.258 23.876,52.146 ; v5(32.944,49.962) 28.702,49.962 26.518,52.146 23.876,52.146 ; C35.1@41.021,6.175 44.371,6.175 45.974,4.572 46.39,4.572 48.387,4.572 ; 48.39,4.569 50.14,2.819 70.028,2.819 71.704,1.143 77.927,1.143 v5@82.194,5.41 ; v2(54.559,58.877) 64.618,58.877 68.367,62.626 Q9.3@69.088,62.626 70.399,62.626 70.942,63.17 70.942,67.386 68.834,69.494 F2.1@68.834,71.323
  Bottom Layer w0.6: 40.464,52.095 v1@44.959,47.601 ; v2(83.82,61.824) 85.547,60.096 93.173,60.096 P10.6@94.627,58.642
  Bottom Layer w0.8: v5@22.454,52.299 v5(22.454,52.197) 22.454,28.931 22.885,28.499 v5@22.885,24.262 ; v5(32.944,49.962) 35.103,49.962 38.329,49.962 44.45,56.083 48.082,56.083 50.876,58.877 v2(54.559,58.877) ; v5(82.245,5.436) 86.589,5.436 87,5.024 P9.5@87,4 P9.6@87,2
VDD_RTC: C37.2 D4.3 R120.1 R124.2 | length 6.7
  Component Side w0.8: R124.2@27.889,59.004 D4.3@27.889,61.62 ; R120.1@29.007,63.195 28.296,63.195 27.889,62.789 D4.3@27.889,61.62 ; C37.2@29.54,61.646 29.515,61.62 D4.3@27.889,61.62
pads on no net: BT1.3 BT1.4 K1.3 K1.4 K3.3 K3.4 K4.3 K4.4 Mark1.0 Mark2.0 Mark3.0 P1.81 P1.82 P2.81 P2.82 P4.3 P4.4 P5.3 P6.1 P9.1 P9.2 P9.9 P9.10 P10.2 P10.9 P14.9 P14.10 P14.11 P14.12 P14.14 P16.0 P17.7 P17.8 P17.16 P18.3 P18.4 P18.5 P19.1 P19.4 P19.6 P19.7 P19.8 P19.9 U1.15 U1.19 U1.22 U1.23 U1.25 U1.30 U3.4 U4.11 U4.12 U4.13 U4.14 U6.8 U6.21 U6.22 U6.26 U6.27 U9.4 U10.5 U10.6 U10.8 U10.16 U10.17 U10.32 U10.33 U10.41 U10.43 U10.44 U11.5 U11.6 U11.8 U11.22 U11.23 U11.26 U11.27 U11.41 U11.43 U11.44 U12.1 U12.2 U12.3 U16.7 U16.8 U16.9 U16.15 U16.16 X1.1

## Polygon pours and split planes (outlines as drawn)
no net on Top Overlay (solid): -0.203,79.959
GND on Component Side "Component Side-GND" (solid, remove dead copper, pour order 24): 0.025,80.112 104.064,80.112 103.988,80.035 103.988,0 0,0 -0.127,0.127
GND on Bottom Layer "Bottom Layer-GND" (solid, remove dead copper, pour order 22): 0.076,79.985 104.038,79.985 104.038,0.025 103.937,-0.076 -0.152,-0.076

## Keep-outs
Keep-Out Layer:
  lines w0.152: -5.004,74.911 -5.004,5.182 ccw(c-3.004,5.132) -3.054,3.132 ; -4.996,74.911 cw(c-2.996,74.861) -2.946,76.86 0,76.86 ; -3.054,3.135 0,3.135 ; 103.975,3.14 107.017,3.14 ; 103.975,76.865 107.03,76.865 ; 106.93,3.141 ccw(c106.98,5.14) 108.979,5.09 ; 107.03,76.862 cw(c106.98,74.863) 108.979,74.813 ; 108.978,5.105 108.978,71.861 108.978,74.81
  lines w0.254: 0,76.86 0,3.135 ccw(c3.347,3.347) 3.56,0 100.44,0 ccw(c100.597,3.403) 103.993,3.136 ; 0,76.865 cw(c3.347,76.653) 3.56,80 100.44,80 cw(c100.653,76.652) 104,76.865 104,3.135

## Silkscreen, mask and mechanical layers (free items; w line width, h text height)
Top Overlay:
  rectangle: 16.815,38.43 21.92,39.802
  region: 19.431,38.252 14.326,38.252 14.326,36.881 19.431,36.881
  region: 36.449,17.856 31.344,17.856 31.344,16.485 36.449,16.485
  rectangle: 33.884,18.11 38.913,19.482
  region: 51.689,43.993 55.817,43.993 55.817,44.018 55.817,44.044 55.817,44.755 58.115,43.485 55.817,42.189 55.817,42.951 51.689,42.951
  region: 51.689,58.395 55.817,58.395 55.817,58.42 55.817,58.445 55.817,59.157 58.115,57.887 55.817,56.591 55.817,57.353 51.689,57.353
  lines w0.152: 0.457,46.558 4.42,46.558 ; 0.457,49.124 4.42,49.124 ; 0.457,51.41 4.394,51.41 ; 0.457,54.051 4.42,54.051 ; 0.457,59.258 4.42,59.258 ; 0.457,61.849 4.445,61.849 ; 0.483,56.693 4.394,56.693 ; 80.747,10.205 92.1,10.205 ; 80.772,13.037 92.126,13.037 ; 80.797,11.621 92.126,11.621 ; 80.874,8.503 92.126,8.503
  lines w0.2: 1.88,43.993 0.457,43.993 0.457,54.051 0.457,64.313 1.88,64.313 ; 42.774,68.377 44.45,68.377 ; 42.774,68.402 43.028,68.656 ; 84.48,6.858 84.48,14.503 ; 87.935,6.858 87.935,14.529 ; 26.961,25.061 26.961,56.061 69.961,56.061 69.961,25.061 26.961,25.061 ; 80.772,6.858 80.772,14.605 92.1,14.605 92.1,6.858 80.772,6.858
  lines w0.254: 9.271,54.991 9.271,56.083 9.703,55.651 ; 13.767,47.244 13.767,37.363 13.767,37.389 14.16,37.782 ; 16.002,43.561 18.491,43.561 18.034,44.018 ; 39.395,22.25 39.878,21.768 39.878,23.901 ; 48.895,72.085 48.387,71.577 48.336,71.577 52.527,71.577 ; 49.784,7.493 49.352,7.925 60.681,7.925 ; 66.472,29.388 71.196,29.388 71.196,29.362 70.612,28.778 ; 79.324,18.821 78.689,18.186 78.664,18.186 88.595,18.186 ; 80.848,55.702 80.848,53.213 80.874,53.213 81.331,53.67 ; 81.712,26.01 82.118,26.416 82.118,15.824 ; 81.94,58.166 71.272,58.166 70.841,57.734 70.841,55.88 81.94,55.88 81.966,55.88 81.966,58.166 ; 89.713,17.297 94.412,17.297 93.624,18.085 ; 14.402,36.881 14.402,38.176 18.796,38.176 21.844,38.176 21.844,36.881 14.402,36.881 ; 14.402,38.506 14.402,39.802 21.844,39.802 21.844,38.506 17.45,38.506 14.402,38.506 ; 31.394,18.186 34.442,18.186 38.837,18.186 38.837,19.482 31.394,19.482 31.394,18.186 ; 31.42,16.485 38.862,16.485 38.862,17.78 35.814,17.78 31.42,17.78 31.42,16.485
  text "DIO" at 1.562,64.059 h0.8 r90
  text "CLK" at 0.787,61.595 h0.8 r270
  text "GND" at 0.787,59.055 h0.8 r270
  text "POR" at 0.762,56.471 h0.8 r270
  text "RST" at 0.762,53.721 h0.8 r270
  text "TDI" at 0.762,51.232 h0.8 r270
  text "TDO" at 0.762,48.895 h0.8 r270
  text "3V3" at 0.787,46.38 h0.8 r270
  text "CAN" at 22.301,38.633 h0.8
  text "ADC" at 22.301,37.084 h0.8
  text "AUDIO" at 27.102,18.212 h0.8
  text "JTAG" at 27.61,16.739 h0.8
  text "SD" at 85.242,13.386 h0.8
  text "NOR" at 81.763,13.335 h0.8
  text "NAND" at 88.697,13.335 h0.8
  text "OFF" at 81.735,11.887 h0.8
  text "OFF" at 85.242,11.862 h0.8
  text "OFF" at 88.697,11.862 h0.8
  text "OFF" at 81.763,10.465 h0.8
  text "OFF" at 85.242,10.465 h0.8
  text "OFF" at 88.697,10.439 h0.8
  text "ON" at 85.242,8.966 h0.8
  text "OFF" at 81.735,8.915 h0.8
  text "ON" at 88.697,8.89 h0.8
  text "OFF" at 81.735,7.264 h0.8
  text "OFF" at 85.242,7.264 h0.8
  text "ON" at 88.697,7.264 h0.8
  text "OFF/ON" at 95.987,6.807 h0.76
Bottom Overlay:
  rectangle: 39.345,20.447 61.9,23.139
  lines w0.2: 37.592,55.118 51.994,55.118 ; 41.275,52.857 41.275,57.48 ; 44.907,52.857 44.907,57.48 ; 48.412,52.857 48.412,57.48 ; 61.468,52.654 61.468,65.126 72.06,65.126 72.06,52.654 ; 61.493,52.654 72.085,52.654 ; 61.493,59.677 72.085,59.677 ; 63.424,52.68 63.424,65.1 ; 65.583,52.68 65.583,65.075 ; 67.742,52.705 67.742,65.075 ; 69.901,52.68 69.901,65.075 ; 78.232,12.344 95.758,12.344 ; 81.087,10.084 81.087,14.707 ; 84.45,10.084 84.45,14.707 ; 89.413,10.084 89.413,14.656 ; 92.903,10.084 92.903,14.707 ; 37.592,52.857 51.994,52.857 51.994,57.48 37.592,57.48 37.592,52.857 ; 78.232,10.084 78.232,14.707 95.809,14.707 95.809,10.084 78.232,10.084
  lines w0.254: 0.457,54.077 0.457,64.262 4.343,64.262 4.394,64.211 4.394,54.051 0.483,54.051 0.457,54.077
  text "RTC" at 23.673,78.105 h1.52 r180
  text "CAMERA" at 42.139,78.105 h1.52 r180
  text "TF_CARD" at 85.065,77.546 h1.52 r180
  text "OTG" at 62.103,72.111 h1.52 r180
  text "USB_HOST" at 71.018,72.111 h1.52 r180
  text "WAKEUP" at 97.13,70.942 h1.52 r90
  text "DC_5V" at 3.581,65.811 h1.52 r270
  text "KEYPAD" at 40.742,65.176 h1.52 r180
  text "GND" at 65.006,64.795 h0.8 r90
  text "VCC5V" at 67.147,64.795 h0.8 r90
  text "SPI_DO" at 69.154,64.795 h0.8 r90
  text "SPI_DI" at 71.298,64.795 h0.8 r90
  text "SPI" at 87.173,59.436 h1.52 r90
  text "SPI_SCLK" at 62.89,59.157 h0.8 r90
  text "SPI_CS0" at 65.031,59.157 h0.8 r90
  text "VCC5V" at 67.172,59.157 h0.8 r90
  text "GND" at 69.313,59.157 h0.8 r90
  text "SWD" at 0.965,58.141 h1 r270
  text "ROW3" at 37.998,56.718 h0.8 r180
  text "ROW2" at 41.563,56.718 h0.8 r180
  text "COL0" at 45.127,56.718 h0.8 r180
  text "ROW0" at 48.692,56.718 h0.8 r180
  text "COL3" at 37.998,54.331 h0.8 r180
  text "COL2" at 41.652,54.331 h0.8 r180
  text "ROW1" at 45.305,54.331 h0.8 r180
  text "COL1" at 48.958,54.331 h0.8 r180
  text "MIC" at 87.147,51.537 h1.52 r90
  text "SWD/JTAG" at 5.817,46.406 h1.52 r270
  text "PHONE" at 87.224,44.729 h1.52 r90
  text "ADC" at 9.474,38.989 h1.52 r270
  text "L" at 2.184,34.646 h1.52 r270
  text "CAN" at 8.407,30.912 h1.52 r270
  text "H" at 2.184,29.464 h1.52 r270
  text "NET" at 95.987,28.575 h1.52 r90
  text "OK1050-C  V1.2" at 53.238,26.467 h2
  text "2018-07-10" at 52.4,24.054 h2
  text "ON/OFF" at 6.121,17.526 h1.52 r270
  text "BOOT" at 100.94,13.995 h1.52 r90
  text "GND" at 83.82,13.31 h0.8
  text "VCC5V" at 88.748,13.31 h0.8
  text "TXD" at 92.329,13.31 h0.8
  text "RST" at 6.121,11.201 h1.52 r270
  text "RXD" at 83.82,10.693 h0.8
  text "VCC5V" at 88.748,10.693 h0.8
  text "GND" at 92.329,10.693 h0.8
  text "UART2" at 90.424,6.985 h1.52
  text "DEBUG(UART1)" at 30.404,2.159 h1.52
  text "LCD" at 61.29,2.159 h1.52
Mechanical 1:
  lines w0.152: 0,-11.303 0,76.86 ; 104,-11.9 104,76.865
  text "V_CUT" at 104.394,-3.759 h1.52 r270
  text "V_CUT" at 0.483,-4.394 h1.52 r270

## Text inside footprints (layer, text, board x,y; h text height)
P19: Bottom Overlay "6" at 18.009,5.918 h0.7 r180; Bottom Overlay "9" at 26.365,6.198 h0.7 r180; Bottom Overlay "5" at 27.661,13.208 h0.7 r180; Bottom Overlay "1" at 16.637,13.208 h0.7 r180